# Altium PCB 2 Layers PCB.PcbDoc (part 1 of 2)
Units mm, origin at the board's own origin, x right, y up, seen from the top; angles counter-clockwise.
Board outline 126.36 x 110.87 mm, 2 copper layers (Top Layer, Bottom Layer), stack 1.569 mm thick; 108 components, 114 nets, 540 pads, 148 vias.
Unrouted connection lines stored in the file: 192.
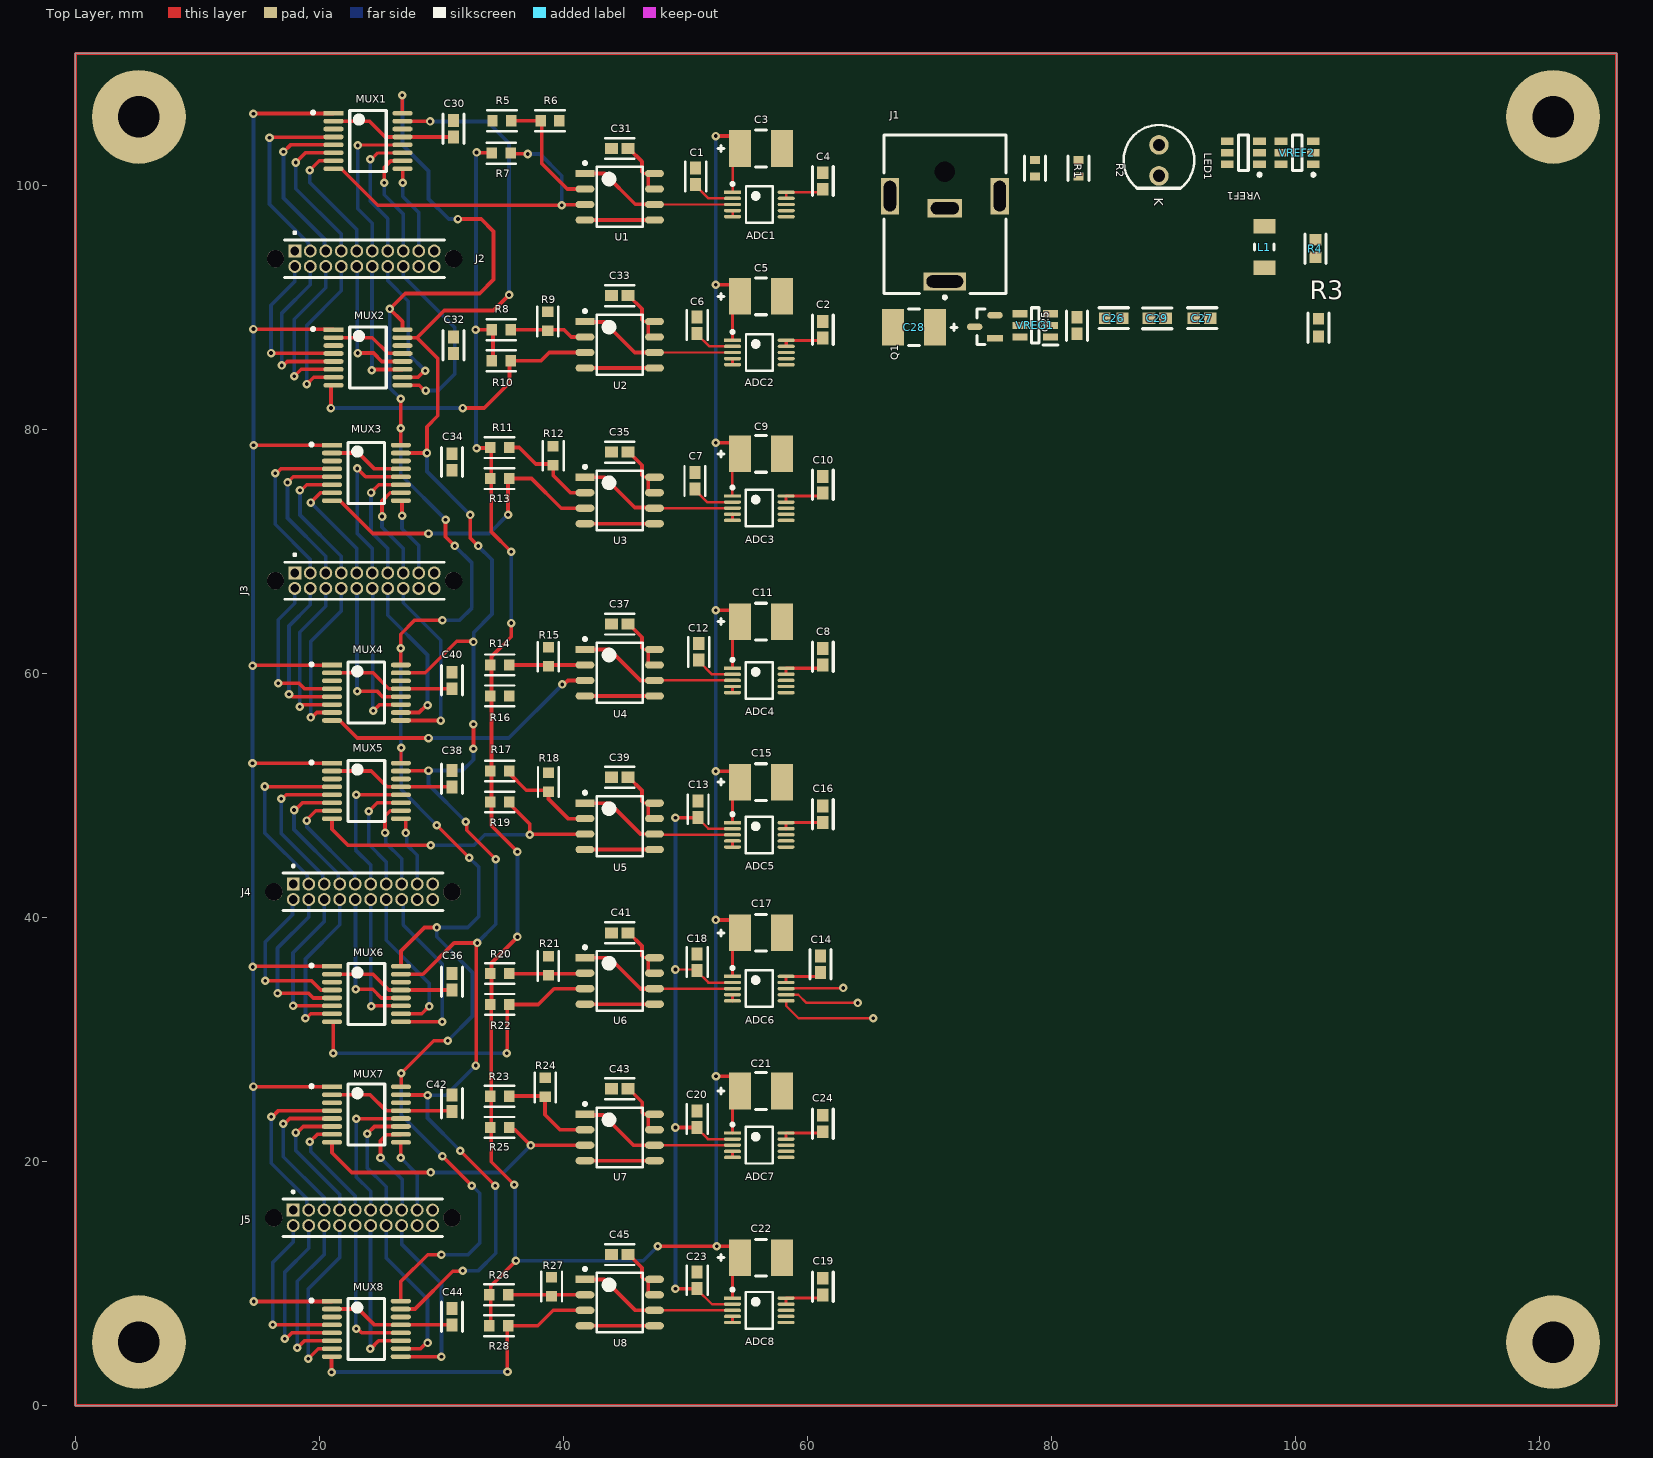
[diagram p0: Top Layer view]
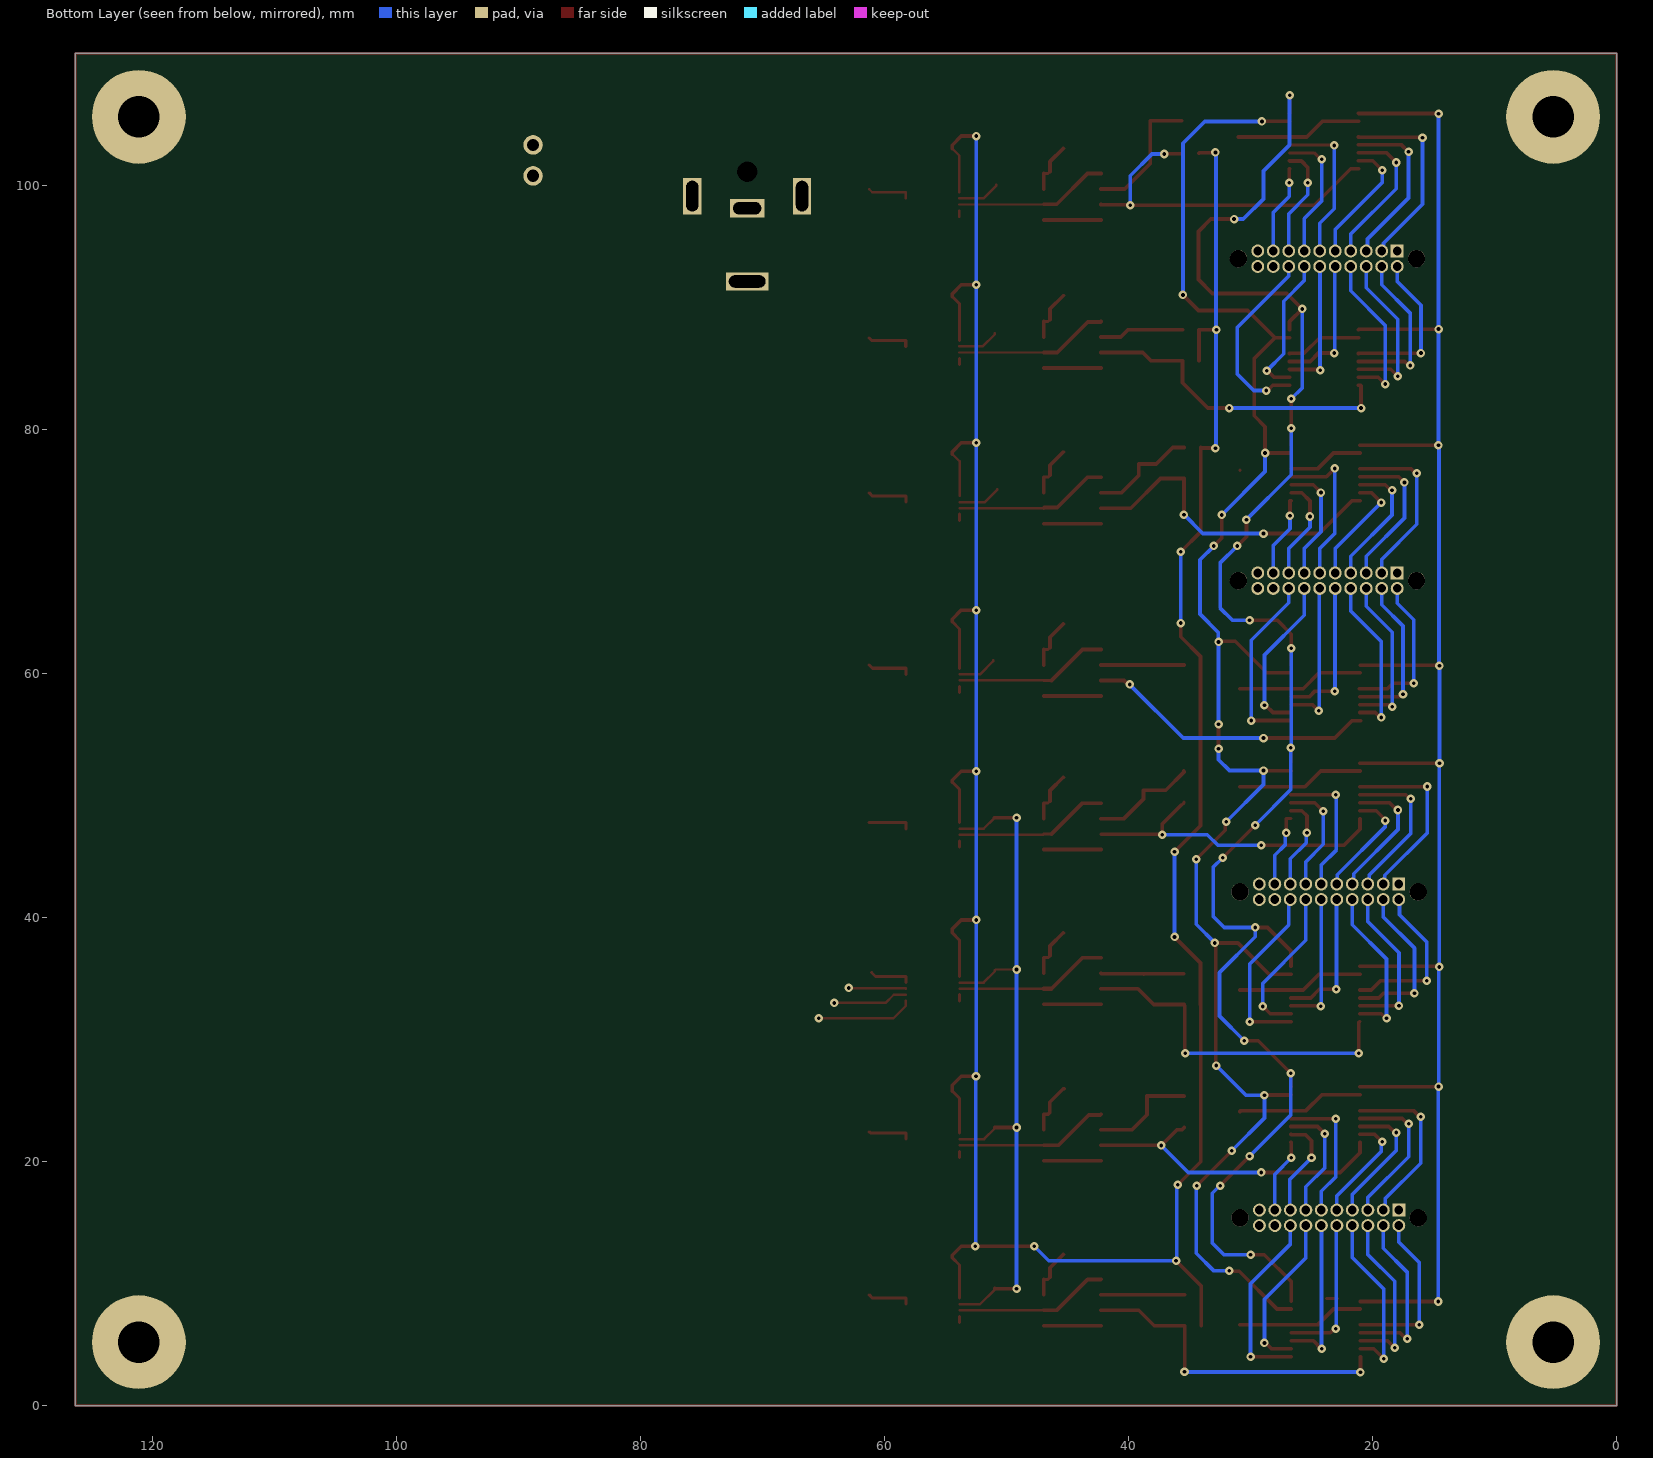
[diagram p1: Bottom Layer view, seen from below]
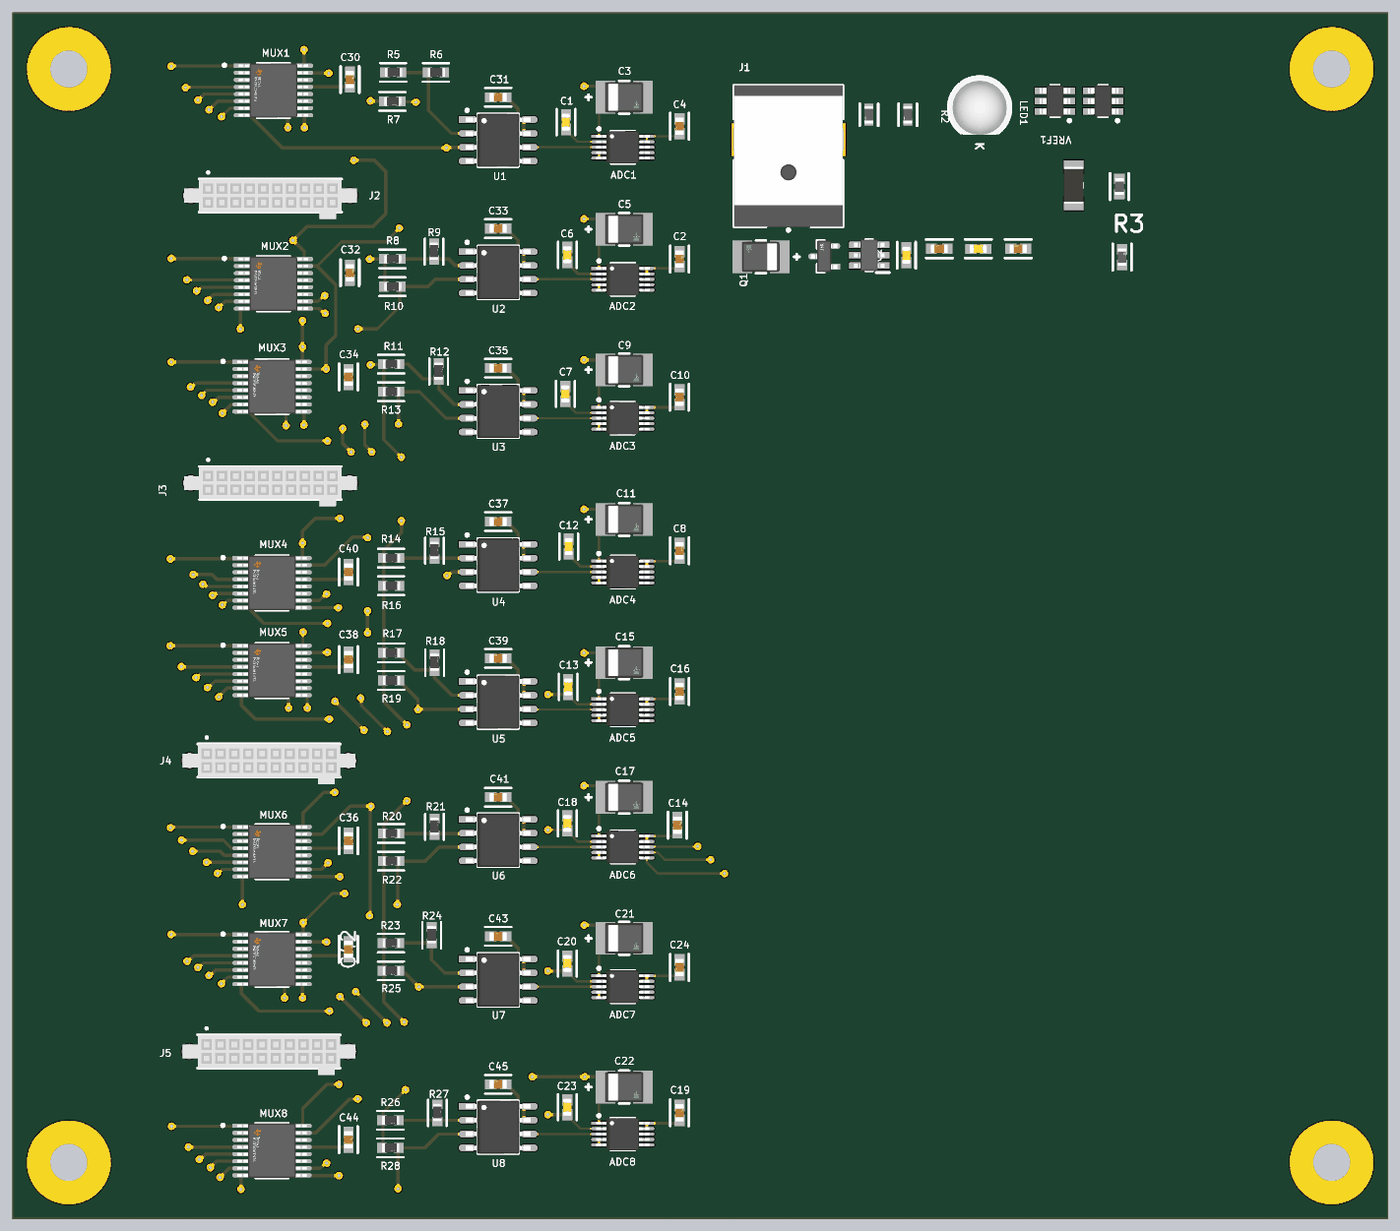
[diagram p3: 3D render of the assembled board from above, using the file's embedded part models]

## Layer stack, top to bottom
Top Solder: solder mask 0.0254, SM-001, Dk 4
Top Layer: signal copper 0.035
Dielectric 1: core 1.4986, Core-043, Dk 4.3
Bottom Layer: signal copper 0.035
Bottom Solder: solder mask 0.0254, SM-001, Dk 4

## Board outline
0,0 0,110.871 126.365,110.871 126.365,0

## Design rules (kind name [scope] priority, off if disabled: settings)
BoardOutlineClearance [All] p1: gap=0.2 ignorepadtopadclearanceinfootprint=FALSE
Clearance [All] p1: gap=0.254 ignorepadtopadclearanceinfootprint=TRUE except(0.127: SMDPad-SMDPad; 0.2: Arc-SMDPad Track-SMDPad; 0.33: Arc-THPad Track-THPad; 0.5: THPad-THPad)
HoleSize [All] p1: absolutevalues=TRUE maxlimit=2.54 minlimit=0.2 maxpercent=80.000 minpercent=20.000
HoleToHoleClearance [All] p1: gap=0.5 allowstackedmicrovias=TRUE
MinimumAnnularRing [All] p1: minimumring=0.2
PolygonConnect [All] p1: connectstyle=Relief reliefconductorwidth=0.254 reliefentries=4 polygonreliefangle="90 Angle" airgapwidth=0.254
RoomDefinition "Power Supply Unit" [InComponentClass('Power Supply Unit')] p1: confinementstyle=ConfineIn formatcopy=TRUE lockcomponents=FALSE outline 64.262,107.315 64.262,58.801 111.633,58.801 111.633,107.315
RoutingVias [All] p1: holewidth=0.3 width=0.7 viastyle="Through Hole" minholewidth=0.2 minwidth=0.5 maxholewidth=0.5 maxwidth=0.9
SolderMaskExpansion [All] p1: expansion=0.102 istentingtop=FALSE
UnRoutedNet [All] p1: checkbadconnections=TRUE
Width [All] p1: maxlimit=0.5 minlimit=0.2 preferedwidth=0.3
27 further rules are at their usual default settings.

## Classes and differential pairs
component class "Weatstone bridge part I": *3 C30 C31 C32 C33 C34 C35 J2 MUX1 MUX2 MUX3 R5 R6 R7 R8 R9 R10 R11 R12 R13 U1 U2 U3
component class "Weatstone bridge part II": *4 C36 C37 C38 C39 C40 C41 J3 J4 MUX4 MUX5 MUX6 R14 R15 R16 R17 R18 R19 R20 R21 R22 U4 U5 U6
component class "Weatstone bridge part III": *5 C42 C43 C44 C45 J5 MUX7 MUX8 R23 R24 R25 R26 R27 R28 U7 U8
component class "Processing interface": *1 ADC1 ADC2 ADC3 ADC4 ADC5 ADC6 ADC7 ADC8 C1 C2 C3 C4 C5 C6 C7 C8 C9 C10 C11 C12 C13 C14 C15 C16 C17 C18 C19 C20 C21 C22 C23 C24
component class "Power Supply Unit": *2 C25 C26 C27 C28 C29 J1 L1 LED1 Q1 R1 R2 R3 R4 VREF1 VREF2 VREG1

## Components (designator, comment, footprint, x,y, rotation, side; value= is the part's Value field where it differs from the comment)
ADC1 "MCP33141-10-E/MS" MCP33141-10-E/MS 56.082,98.478 r0 top
ADC2 "MCP33141-10-E/MS" MCP33141-10-E/MS 56.082,86.343 r0 top
ADC3 "MCP33141-10-E/MS" MCP33141-10-E/MS 56.074,73.582 r0 top
ADC4 "MCP33141-10-E/MS" MCP33141-10-E/MS 56.074,59.459 r0 top
ADC5 "MCP33141-10-E/MS" MCP33141-10-E/MS 56.074,46.799 r0 top
ADC6 "MCP33141-10-E/MS" MCP33141-10-E/MS 56.074,34.191 r0 top
ADC7 "MCP33141-10-E/MS" MCP33141-10-E/MS 56.074,21.355 r0 top
ADC8 "MCP33141-10-E/MS" MCP33141-10-E/MS 56.074,7.82 r0 top
C1 "CC0603KPX7R7BB105" FP-CC0603-DA-IPC_B 50.854,100.784 r270 top value=1uF
C2 "CC0603JRX7R9BB104" FP-CC0603-DA-IPC_B 61.281,88.206 r270 top value=100nF
C3 "293D106X9016B2TE3" FP-293D-B-MFG 56.201,103.069 r180 top value=10uF
C4 "CC0603JRX7R9BB104" FP-CC0603-DA-IPC_B 61.281,100.403 r90 top value=100nF
C5 "293D106X9016B2TE3" FP-293D-B-MFG 56.201,90.94 r180 top value=10uF
C6 "CC0603KPX7R7BB105" FP-CC0603-DA-IPC_B 50.981,88.592 r90 top value=1uF
C7 "CC0603KPX7R7BB105" FP-CC0603-DA-IPC_B 50.8,75.819 r270 top value=1uF
C8 "CC0603JRX7R9BB104" FP-CC0603-DA-IPC_B 61.281,61.406 r270 top value=100nF
C9 "293D106X9016B2TE3" FP-293D-B-MFG 56.201,78.027 r180 top value=10uF
C10 "CC0603JRX7R9BB104" FP-CC0603-DA-IPC_B 61.281,75.511 r90 top value=100nF
C11 "293D106X9016B2TE3" FP-293D-B-MFG 56.201,64.285 r180 top value=10uF
C12 "CC0603KPX7R7BB105" FP-CC0603-DA-IPC_B 51.108,61.795 r90 top value=1uF
C13 "CC0603KPX7R7BB105" FP-CC0603-DA-IPC_B 51.054,48.895 r270 top value=1uF
C14 "CC0603JRX7R9BB104" FP-CC0603-DA-IPC_B 61.087,36.195 r270 top value=100nF
C15 "293D106X9016B2TE3" FP-293D-B-MFG 56.201,51.127 r180 top value=10uF
C16 "CC0603JRX7R9BB104" FP-CC0603-DA-IPC_B 61.281,48.476 r90 top value=100nF
C17 "293D106X9016B2TE3" FP-293D-B-MFG 56.201,38.762 r180 top value=10uF
C18 "CC0603KPX7R7BB105" FP-CC0603-DA-IPC_B 50.981,36.364 r90 top value=1uF
C19 "CC0603JRX7R9BB104" FP-CC0603-DA-IPC_B 61.281,9.767 r270 top value=100nF
C20 "CC0603KPX7R7BB105" FP-CC0603-DA-IPC_B 50.981,23.49 r270 top value=1uF
C21 "293D106X9016B2TE3" FP-293D-B-MFG 56.201,25.8 r180 top value=10uF
C22 "293D106X9016B2TE3" FP-293D-B-MFG 56.201,12.138 r180 top value=10uF
C23 "CC0603KPX7R7BB105" FP-CC0603-DA-IPC_B 50.981,10.287 r90 top value=1uF
C24 "CC0603JRX7R9BB104" FP-CC0603-DA-IPC_B 61.281,23.133 r90 top value=100nF
C25 "CC0603KRX7R5BB225" FP-CC0603-DA-IPC_B 82.111,88.554 r90 top value=2.2uF
C26 "GRM188R71E224KA88D" FP-GRM188-0_1-e0_2_0_5-IPC_B 85.131,89.154 r180 top value=220nF
C27 "CC0603JRX7R9BB104" FP-CC0603-DA-IPC_B 92.371,89.154 r0 top value=100nF
C28 "293D106X9016B2TE3" FP-293D-B-MFG 68.758,88.41 r0 top value=10uF
C29 "CC0603KRX7R5BB225" FP-CC0603-DA-IPC_B 88.715,89.147 r180 top value=2.2uF
C30 "CC0603JRX7R9BB104" FP-CC0603-DA-IPC_B 31.014,104.691 r270 top value=100nF
C31 "CC0603JRX7R9BB104" FP-CC0603-DA-IPC_B 44.631,103.069 r0 top value=100nF
C32 "CC0603JRX7R9BB104" FP-CC0603-DA-IPC_B 31.014,86.938 r270 top value=100nF
C33 "CC0603JRX7R9BB104" FP-CC0603-DA-IPC_B 44.631,91.005 r0 top value=100nF
C34 "CC0603JRX7R9BB104" FP-CC0603-DA-IPC_B 30.887,77.367 r270 top value=100nF
C35 "CC0603JRX7R9BB104" FP-CC0603-DA-IPC_B 44.631,78.178 r0 top value=100nF
C36 "CC0603JRX7R9BB104" FP-CC0603-DA-IPC_B 30.888,34.756 r270 top value=100nF
C37 "CC0603JRX7R9BB104" FP-CC0603-DA-IPC_B 44.631,64.081 r0 top value=100nF
C38 "CC0603JRX7R9BB104" FP-CC0603-DA-IPC_B 30.888,51.409 r270 top value=100nF
C39 "CC0603JRX7R9BB104" FP-CC0603-DA-IPC_B 44.631,51.516 r0 top value=100nF
C40 "CC0603JRX7R9BB104" FP-CC0603-DA-IPC_B 30.887,59.456 r270 top value=100nF
C41 "CC0603JRX7R9BB104" FP-CC0603-DA-IPC_B 44.631,38.762 r0 top value=100nF
C42 "CC0603JRX7R9BB104" FP-CC0603-DA-IPC_B 30.88,24.79 r270 top value=100nF
C43 "CC0603JRX7R9BB104" FP-CC0603-DA-IPC_B 44.631,25.981 r0 top value=100nF
C44 "CC0603JRX7R9BB104" FP-CC0603-DA-IPC_B 30.88,7.301 r270 top value=100nF
C45 "CC0603JRX7R9BB104" FP-CC0603-DA-IPC_B 44.631,12.392 r0 top value=100nF
J1 "PJ-063AH" CUI-PJ-063AH_V 71.284,98.168 r90 top
J2 "SFC-110-T1-F-D-A" SFC-110-T1-F-D-A-Footprint-2 23.709,94.034 r180 top
J3 "SFC-110-T1-F-D-A" SFC-110-T1-F-D-A-Footprint-2 23.709,67.637 r180 top
J4 "SFC-110-T1-F-D-A" SFC-110-T1-F-D-A-Footprint-2 23.583,42.128 r180 top
J5 "SFC-110-T1-F-D-A" SFC-110-T1-F-D-A-Footprint-2 23.575,15.406 r180 top
L1 "ILSB1206ER4R7K" INDC3216X14N 97.478,94.989 r270 top value=4.7uH
LED1 "151053GS03000" "Type 5mm" 88.838,102.096 r270 top
MUX1 "TMUX1208PWR" FP-PW0016A-IPC_B 23.995,103.689 r0 top
MUX2 "TMUX1208PWR" FP-PW0016A-IPC_B 23.995,85.936 r0 top
MUX3 "TMUX1208PWR" FP-PW0016A-IPC_B 23.868,76.477 r0 top
MUX4 "TMUX1208PWR" FP-PW0016A-IPC_B 23.868,58.454 r0 top
MUX5 "TMUX1208PWR" FP-PW0016A-IPC_B 23.869,50.407 r0 top
MUX6 "TMUX1208PWR" FP-PW0016A-IPC_B 23.869,33.754 r0 top
MUX7 "TMUX1208PWR" FP-PW0016A-IPC_B 23.869,23.866 r0 top
MUX8 "TMUX1208PWR" FP-PW0016A-IPC_B 23.861,6.299 r0 top
Q1 "IRLML9303TRPBF" FP-Micro3-IPC_C 74.563,88.45 r180 top
R1 "AC0603FR-072K4L" FP-AC0603-IPC_C 78.673,101.464 r270 top value=2.4kR
R2 "AC0603FR-075K1L" FP-AC0603-IPC_C 82.239,101.464 r270 top value=5.1kR
R3 "CRCW060322K1FKEA" CRCW060322K1FKEA-Footprint-2 101.923,88.385 r270 top value=22K1
R4 "CRCW060388K7FKEB" FP-CRCW0603-e3-IPC_B 101.669,94.862 r90 top value=88K7
R5 "RT0603BRD0710KL" FP-RT0603-IPC_B 34.979,105.348 r0 top value=10K
R6 "RT0603BRD0710KL" FP-RT0603-IPC_B 38.916,105.348 r0 top value=10K
R7 "RT0603BRD0710KL" FP-RT0603-IPC_B 34.917,102.684 r0 top value=10K
R8 "RT0603BRD0710KL" FP-RT0603-IPC_B 34.917,88.211 r0 top value=10K
R9 "RT0603BRD0710KL" FP-RT0603-IPC_B 38.735,88.888 r90 top value=10K
R10 "RT0603BRD0710KL" FP-RT0603-IPC_B 34.917,85.671 r0 top value=10K
R11 "RT0603BRD0710KL" FP-RT0603-IPC_B 34.79,78.55 r0 top value=10K
R12 "RT0603BRD0710KL" FP-RT0603-IPC_B 39.17,77.873 r90 top value=10K
R13 "RT0603BRD0710KL" FP-RT0603-IPC_B 34.79,76.01 r0 top value=10K
R14 "RT0603BRD0710KL" FP-RT0603-IPC_B 34.791,60.729 r0 top value=10K
R15 "RT0603BRD0710KL" FP-RT0603-IPC_B 38.78,61.405 r90 top value=10K
R16 "RT0603BRD0710KL" FP-RT0603-IPC_B 34.791,58.189 r0 top value=10K
R17 "RT0603BRD0710KL" FP-RT0603-IPC_B 34.791,52.032 r0 top value=10K
R18 "RT0603BRD0710KL" FP-RT0603-IPC_B 38.789,51.127 r90 top value=10K
R19 "RT0603BRD0710KL" FP-RT0603-IPC_B 34.791,49.492 r0 top value=10K
R20 "RT0603BRD0710KL" FP-RT0603-IPC_B 34.791,35.433 r0 top value=10K
R21 "RT0603BRD0710KL" FP-RT0603-IPC_B 38.781,36.056 r90 top value=10K
R22 "RT0603BRD0710KL" FP-RT0603-IPC_B 34.791,32.893 r0 top value=10K
R23 "RT0603BRD0710KL" FP-RT0603-IPC_B 34.783,25.369 r0 top value=10K
R24 "RT0603BRD0710KL" FP-RT0603-IPC_B 38.527,26.09 r90 top value=10K
R25 "RT0603BRD0710KL" FP-RT0603-IPC_B 34.783,22.813 r0 top value=10K
R26 "RT0603BRD0710KL" FP-RT0603-IPC_B 34.725,9.09 r0 top value=10K
R27 "RT0603BRD0710KL" FP-RT0603-IPC_B 39.043,9.767 r90 top value=10K
R28 "RT0603BRD0710KL" FP-RT0603-IPC_B 34.725,6.55 r0 top value=10K
U1 "MCP6N11-100E/SN" MCP6N11-100E/SN 44.631,99.113 r0 top
U2 "MCP6N11-100E/SN" MCP6N11-100E/SN 44.631,86.978 r0 top
U3 "MCP6N11-100E/SN" MCP6N11-100E/SN 44.631,74.217 r0 top
U4 "MCP6N11-100E/SN" MCP6N11-100E/SN 44.631,60.094 r0 top
U5 "MCP6N11-100E/SN" MCP6N11-100E/SN 44.631,47.497 r0 top
U6 "MCP6N11-100E/SN" MCP6N11-100E/SN 44.631,34.826 r0 top
U7 "MCP6N11-100E/SN" MCP6N11-100E/SN 44.631,21.99 r0 top
U8 "MCP6N11-100E/SN" MCP6N11-100E/SN 44.631,8.455 r0 top
VREF1 "MCP1501T-33E/CHY" SOT95P280X118-6N 95.758,102.718 r180 top
VREF2 "MCP1501T-18E/CHY" MCP1501T-18E/CHY 100.17,102.718 r180 top
VREG1 "LMR50410YFQDBVRQ1" SOT95P280X145-6N 78.695,88.56 r180 top

## Footprints (in the part's own frame and the unit in brackets; to place one, negate y for a bottom-side part, rotate by r counter-clockwise, add the part's x,y. Pads: shape width x height; smd on the part's side, far side on the other; paste and mask are expansions set on the pad)
CRCW060322K1FKEA-Footprint-2 [mm]
  rect 0.958x0.912 smd paste+0 mask+0: 1(-0.727,0) 2(0.727,0)
  silkscreen extent -1.21,-0.86 1.21,0.86, body extent -1.46,-0.71 1.46,0.71, height 0.25
CUI-PJ-063AH_V [mm] "THD, 2-Leads, Body 13x10mm, Height 9mm"
  rect 1.5x3.5 hole 1 slot 3 at 90 deg: 1(-6,0)
  rect 1.5x2.8 hole 1 slot 2.3 at 90 deg: 2(0,0)
  rect 3x1.5 hole 1 slot 2.5 at 0 deg: 3(1,4.5) 4(1,-4.5)
  round 1.4 hole 1.7 unplated: 5(3,0)
  silkscreen extent -7.42,-5 6,5, body extent -7,-5.15 6,5.15, height 9
FP-293D-B-MFG [mm]
  rect 1.8x3 smd paste+0 mask+0: 1(-1.725,0) 2(1.725,0)
  silkscreen extent -0.45,-1.5 3.52,1.5, body extent -2.73,-1.6 2.73,1.6, height 0.25
FP-AC0603-IPC_C [mm]
  rect 0.659x0.812 smd paste+0 mask+0: 1(-0.677,0) 2(0.677,0)
  silkscreen extent -1.01,-0.85 1.01,0.85, body extent -1.11,-0.55 1.11,0.55, height 0.25
FP-CC0603-DA-IPC_B [mm]
  rect 1.058x0.912 smd paste+0 mask+0: 1(-0.677,0) 2(0.677,0)
  silkscreen extent -1.21,-0.86 1.21,0.86, body extent -1.46,-0.71 1.46,0.71, height 0.25
FP-CRCW0603-e3-IPC_B [mm]
  rect 0.935x0.962 smd paste+0 mask+0: 1(-0.715,0) 2(0.715,0)
  silkscreen extent -1.21,-0.86 1.21,0.86, body extent -1.43,-0.73 1.43,0.73, height 0.25
FP-GRM188-0_1-e0_2_0_5-IPC_B [mm]
  rect 0.959x0.912 smd paste+0 mask+0: 1(-0.727,0) 2(0.727,0)
  silkscreen extent -1.21,-0.86 1.21,0.86, body extent -1.46,-0.71 1.46,0.71, height 0.25
FP-Micro3-IPC_C [mm]
  rect 1.274x0.532 smd paste+0 mask+0: 1(-0.835,0.95)
  rrect100% 1.274x0.532 smd paste+0 mask+0: 2(-0.835,-0.95) 3(0.835,0)
  silkscreen extent 0,-1.46 0.65,1.46, body extent -1.57,-1.56 1.57,1.56, height 0.25
FP-PW0016A-IPC_B [mm]
  rect 1.655x0.381 smd paste+0 mask+0: 1(-2.825,2.275)
  rrect100% 1.655x0.381 smd paste+0 mask+0: 2(-2.825,1.625) 3(-2.825,0.975) 4(-2.825,0.325) 5(-2.825,-0.325) 6(-2.825,-0.975) 7(-2.825,-1.625) 8(-2.825,-2.275) 9(2.825,-2.275) 10(2.825,-1.625) 11(2.825,-0.975) 12(2.825,-0.325) 13(2.825,0.325) 14(2.825,0.975) 15(2.825,1.625) 16(2.825,2.275)
  silkscreen extent -4.63,-2.5 1.5,2.5, body extent -3.9,-2.75 3.9,2.75, height 0.25
FP-RT0603-IPC_B [mm]
  rect 0.859x0.912 smd paste+0 mask+0: 1(-0.777,0) 2(0.777,0)
  silkscreen extent -1.21,-0.86 1.21,0.86, body extent -1.46,-0.71 1.46,0.71, height 0.25
INDC3216X14N [mm] "Chip Inductor, 2-Leads, Body 3,20x1,60mm, IPC Medium Density"
  rect 1.2x1.8 smd: 1(-1.7,0) 2(1.7,0)
  silkscreen extent -0.25,-0.8 0.25,0.8, body extent -1.7,-0.9 1.7,0.9, height 1.4
MCP6N11-100E/SN [mm] "SOIC, 8-Leads, Body 4,90x3,90mm, Pitch 1,27mm, IPC Medium Density"
  rect 1.55x0.6 smd: 1(-2.85,1.905)
  oval 1.55x0.6 smd: 2(-2.85,0.635) 3(-2.85,-0.635) 4(-2.85,-1.905) 5(2.85,-1.905) 6(2.85,-0.635) 7(2.85,0.635) 8(2.85,1.905)
  silkscreen extent -2.97,-2.45 1.88,2.88, body extent -3,-2.45 3,2.45, height 1.75
MCP1501T-18E/CHY [mm] "SOT23, 6-Leads, Body 2,90x2,80mm, Pitch 0,95mm, IPC Medium Density"
  rect 1.05x0.6 smd: 1(-1.325,0.95) 2(-1.325,0) 3(-1.325,-0.95) 4(1.325,-0.95) 5(1.325,0) 6(1.325,0.95)
  silkscreen extent -1.45,-1.45 0.4,1.92, body extent -1.4,-1.45 1.4,1.45, height 1.17
MCP33141-10-E/MS [mm] "TSSOP, 10-Leads, Body 3,00x3,00mm, Pitch 0,50mm, IPC Low Density"
  rect 1.4x0.28 smd: 1(-2.2,1)
  oval 1.4x0.28 smd: 2(-2.2,0.5) 3(-2.2,0) 4(-2.2,-0.5) 5(-2.2,-1) 6(2.2,-1) 7(2.2,-0.5) 8(2.2,0) 9(2.2,0.5) 10(2.2,1)
  silkscreen extent -2.32,-1.5 1.1,1.81, body extent -2.45,-1.5 2.45,1.5, height 1.1
SFC-110-T1-F-D-A-Footprint-2 [mm]
  rect 1.06x1.06 hole 0.71: 1(5.715,-0.635)
  round 1.06 hole 0.71: 2(5.715,0.635) 3(4.445,-0.635) 4(4.445,0.635) 5(3.175,-0.635) 6(3.175,0.635) 7(1.905,-0.635) 8(1.905,0.635) 9(0.635,-0.635) 10(0.635,0.635) 11(-0.635,-0.635) 12(-0.635,0.635) 13(-1.905,-0.635) 14(-1.905,0.635) 15(-3.175,-0.635) 16(-3.175,0.635) 17(-4.445,-0.635) 18(-4.445,0.635) 19(-5.715,-0.635) 20(-5.715,0.635)
  round 1.42 hole 1.42 unplated: ""(-7.305,0) ""(7.305,0)
  silkscreen extent -6.54,-2.22 6.54,1.53, body extent -7.94,-1.52 7.94,2.16, height 4.57
SOT95P280X118-6N [mm] "SOT23, 6-Leads, Body 2,90x2,80mm, Pitch 0,95mm, IPC Medium Density"
  rect 1.05x0.6 smd: 1(-1.325,0.95) 2(-1.325,0) 3(-1.325,-0.95) 4(1.325,-0.95) 5(1.325,0) 6(1.325,0.95)
  silkscreen extent -1.45,-1.45 0.4,1.92, body extent -1.4,-1.45 1.4,1.45, height 1.17
SOT95P280X145-6N [mm]
  rect 1.2x0.6 smd: 1(-1.25,0.95) 2(-1.25,0) 3(-1.25,-0.95) 4(1.25,-0.95) 5(1.25,0) 6(1.25,0.95)
  silkscreen extent -1.85,-1.45 0.3,1.6, body extent -1.4,-1.45 1.4,1.45, height 1.45
"Type 5mm" [mm] "THT, LED-5mm, 2pin- Body 5.8mm"
  round 1.6 hole 1: 1(1.27,0) 2(-1.27,0)
  silkscreen extent -2.9,-2.9 2.29,2.9, body extent -2.9,-2.9 2.5,2.9, height 11.7

## Part data
ADC1 ADC2 ADC3 ADC4 ADC5 ADC6 ADC7 ADC8: library part CMP-020-00028-10, "ADC Single SAR 1Msps 12-bit Serial Microwire/SPI 10-Pin MSOP Tray", Architecture=SAR, Data Interface=SPI, Resolution="12 Bits", Sampling rate=1M
C1 C6 C7 C12 C13 C18 C20 C23: library part CMP-001-00101-1, "0603 1 uF 16 V ±10 % Tolerance X7R SMT Multilayer Ceramic Capacitor", Case Code (Imperial)=0603, Case Code (Metric)=1608, Dielectric=X7R, Max Operating Temperature=125°C, Min Operating Temperature=-55°C, Resistor Type=Ceramic, Tolerance=10%, Voltage Rating (DC)=16V, Case/Package=0603, Construction=Flat, Depth=0.8mm, Halogen Free="Halogen Free", Height=0.8mm, Lead Free="Lead Free", Length=1.6mm, Mounting Technology="Surface Mount", Packaging="Tape and Reel", Radiation Hardening=No, RoHS Compliant=Yes, Termination=SMD/SMT, Weight=7.1E-05oz
C2 C4 C8 C10 C14 C16 C19 C24 C27 C30 C31 C32 C33 C34 C35 C36 C37 C38 C39 C40 C41 C42 C43 C44 C45: library part CMP-001-00097-1, "0603 0.1 uF 50 V ±5 % Tolerance X7R SMT Multilayer Ceramic Capacitor", Case Code (Imperial)=0603, Case Code (Metric)=1608, Dielectric=X7R, Max Operating Temperature=125°C, Min Operating Temperature=-55°C, Resistor Type=Ceramic, Tolerance=5%, Voltage Rating=50V, Case/Package=0603, Construction=Flat, Depth=0.8mm, Halogen Free="Halogen Free", Height=0.8mm, Lead Free="Lead Free", Length=0.063inch, Mounting Technology="Surface Mount", Packaging="Tape and Reel", Pins=2, Radiation Hardening=No, RoHS Compliant=Yes, Series=CC, Termination=SMD/SMT, Thickness=0.035inch, Voltage Rating (DC)=50V, Weight=7.1E-05oz, Width=0.031inch
C3 C5 C9 C11 C15 C17 C21 C22 C28: library part CMP-001-00090-1, "Cap Tant Solid 10uF 16V B CASE 10% (3.5 X 2.8 X 1.9mm) Inward L SMD 3528-21 2 Ohm 125C T/R", Case Code (Imperial)=1411, Case Code (Metric)=3528, Dielectric Material=Tantalum, ESR (Equivalent Series Resistance)=2R, Leakage Current=1.6uA, Max Operating Temperature=125°C, Min Operating Temperature=-55°C, Package Quantity=2000, Ripple Current=160mA, Tolerance=10%, Voltage=16V, Case/Package=1411, Construction=Flat, Depth=2.8mm, Dissipation Factor=6%, Features="General Purpose", Height=1.9mm, Height - Seated (Max)=0.083inch, Lead Free="Lead Free", Length=3.5mm, Mounting Technology="Surface Mount,PCB", Packaging="Tape and Reel", Polarity=Polar, Q Factor=6, Radiation Hardening=No, RoHS Compliant=Yes, Series="TANTAMOUNT®, 293D", Termination=SMD/SMT, Voltage Rating=16V, Voltage Rating (DC)=16V, Width=1.9mm
C25 C29: library part CMP-001-00098-1, "MLCC- CAPACITANCE 225", Case Code (Imperial)=0603, Case Code (Metric)=1608, Dielectric=X7R, Max Operating Temperature=125°C, Min Operating Temperature=-55°C, Resistor Type=Ceramic, Tolerance=10%, Voltage Rating=6.3V, Case/Package=0603, Construction=Flat, Depth=0.8mm, Halogen Free="Halogen Free", Height=0.8mm, Lead Free="Lead Free", Length=0.063inch, Mounting Technology="Surface Mount", Packaging="Tape and Reel", Radiation Hardening=No, RoHS Compliant=Yes, Series=CC, Termination=SMD/SMT, Thickness=0.035inch, Voltage Rating (DC)=6.3V, Weight=7.1E-05oz, Width=0.031inch
C26: library part CMP-001-00102-1, "0603 0.22 uF 25 V ±10% Tolerance X7R SMT Multilayer Ceramic Capacitor", Case Code (Imperial)=0603, Case Code (Metric)=1608, Dielectric=X7R, Max Operating Temperature=125°C, Min Operating Temperature=-55°C, Package Quantity=1, Tolerance=10%, Voltage=25V, Case/Package=0603, Construction=Flat, Depth=0.8mm, Height=0.8mm, Lead Free="Lead Free", Length=1.6mm, Material=Ceramic, Mounting Technology="Surface Mount", Packaging="Tape and Reel", Pins=2, Radiation Hardening=No, Reach SVHC Compliant=Yes, RoHS Compliant=Yes, Series=GRM, Termination=SMD/SMT, Thickness=0.035inch, Voltage Rating=25V, Voltage Rating (DC)=25V, Width=0.031inch
J1: library part CMP-002-00079-1, "2.0 x 6.5 mm, 8.0 A, Horizontal, Through Hole, Shielded, Kinked Pins, Dc Power Jack Connector", Current Rating=8A, Flammability Rating="UL94 V-0", Housing Color=Black, Insulation Resistance=100MR, Max Operating Temperature=85°C, Min Operating Temperature=-25°C, Package Quantity=500, Voltage Rating=24V, Connector Type=Jack, Contact Gender=Male, Contact Material=Copper, Contact Plating=Nickel, Gender=Male, Housing Material=Thermoplastic, Lead Free="Lead Free", Mounting Technology="Through Hole", Number of Conductors=2, Orientation=Horizontal, RoHS Compliant=Yes, Series=-, Shielding=Shielded, Termination="Through Hole"
J2 J3 J4 J5: library part CMP-002-00080-2, "Headers & Wire Housings .050 Tiger Eye Cost-Effective Reliable Socket Strip", Color=Black, Max Operating Temperature=125°C, Min Operating Temperature=-55°C, Voltage Rating (AC)=350V, Connector Type=Receptacle, Contact Finish - Mating=GOLD, Contact Material=Bronze, Contact Plating=Gold, Contact Shape=Square, Contact Type="Female Socket", Fastening Type=Pull, Gender=Female, Insulation Color=Black, Insulation Material=Polymer, Mounting Technology="Through Hole", Number of Contacts=20, Number of Positions=20, Number of Rows=2, Packaging=Rail/Tube, Pitch=0.05inch, RoHS Compliant=Yes, Row Spacing=0.05inch, Series="Tiger Eye™ SFC", Termination=Solder
L1: library part CMP-006-00022-1, "Inductor RF Chip Shielded Multi-Layer 4.7uH 10% 10MHz 45Q-Factor 50mA 900mOhm DCR 1206 T/R", Case Code (Imperial)=1206, Case Code (Metric)=3216, Current Rating=50mA, DC Resistance (DCR)=900mR, Max Operating Temperature=125°C, Min Operating Temperature=-55°C, Package Quantity=3000, Self Resonant Frequency=41MHz, Test Frequency=10MHz, Tolerance=10%, Case/Package=1206, Core Material=Ferrite, Depth=1.8mm, Height=1.1mm, Height - Seated (Max)=0.055inch, Lead Free="Lead Free", Length=0.126inch, Max DC Current=50mA, Mounting Technology="Surface Mount", Packaging="Tape and Reel", Q Factor=45, Radiation Hardening=No, RoHS Compliant=Yes, Series=ILSB-1206, Shielding=Shielded, Termination=SMD/SMT, Weight=0.000353oz, Width=1.6mm
LED1: library part CMP-007-00044-1, "Led, Green, T-1 3/4 (5Mm), 522 Nm, 3.4 V, 30 Ma, 10 Cd Rohs Compliant: Yes", Case/Package=Radial, Color=Green, Forward Current=30mA, Forward Voltage=3.4V, Lens Color=Colorless, Max Operating Temperature=85°C, Min Operating Temperature=-40°C, Package Quantity=1, Test Current=20mA, Dominant Wavelength=522nm, Height=8.85mm, Lens Size=5mm, Lens Style=Round,Domed,Circular, Lens Transparency=Clear, Luminous Intensity=10000mcd, Mounting Technology="Through Hole", Packaging=Bulk, RoHS Compliant=Yes, Series=WL-TMRW, Viewing Angle=30°, Wavelength=522nm
MUX1 MUX2 MUX3 MUX4 MUX5 MUX6 MUX7 MUX8: library part CMP-015-00012-1, "5-V, 8: 1, 1-channel general-purpose analog multiplexer with 1.8-V input logic 16-TSSOP -40 to 125", RoHS Compliant=Yes
Q1: library part CMP-013-00037-1, "-30V Single P-Channel HEXFET Power MOSFET in a Micro3 package, SOT23-3, RoHS", Case/Package=SOT-23, Continuous Drain Current (ID)=2.3A, Drain to Source Resistance=270mR, Drain to Source Voltage (Vdss)=-30V, Gate to Source Voltage (Vgs)=20V, Input Capacitance=160pF, Max Operating Temperature=150°C, Max Power Dissipation=1.25W, Min Operating Temperature=-55°C, Threshold Voltage=-1.3V, Element Configuration=Single, Halogen Free="Halogen Free", Height=0.04inch, Lead Free="Lead Free", Length=0.119inch, Max Dual Supply Voltage=-30V, Mounting Technology="Surface Mount", Packaging="Cut Tape", Pins=3, Power Dissipation=1.25W, Rds On Max=165mR, Reach SVHC Compliant=Yes, Rise Time=14ns, RoHS Compliant=Yes, Series=HEXFET®, Turn-Off Delay Time=9ns, Turn-On Delay Time=7.5ns, Width=0.055inch
R1: library part CMP-009-00195-2, "Res Thick Film 0603 2.4K Ohm 1% 0.1W(1/10W) ±100ppm/C Pad SMD Automotive T/R", Case Code (Imperial)=0603, Case Code (Metric)=1608, Max Operating Temperature=155°C, Max Power Dissipation=100mW, Min Operating Temperature=-55°C, Ratings=AEC-Q200, Resistor Type="Thick Film", Temperature Coefficient=100ppm/°C, Tolerance=1%, Voltage Rating=50V, Case/Package=0603, Features="Moisture Resistant,Automotive AEC-Q200", Height=0.022inch, Length=0.063inch, Number of Terminations=2, Packaging="Tape and Reel", Power Rating=100mW, RoHS Compliant=Yes, Series=AC, Termination=SMD/SMT, Weight=7.1E-05oz, Width=0.8mm
R2: library part CMP-009-00196-1, "Res Thick Film 0603 5.1K Ohm 1% 1/10W ±100ppm/°C Molded SMD Paper T/R", Case Code (Imperial)=0603, Case Code (Metric)=1608, Max Operating Temperature=155°C, Max Power Dissipation=100mW, Min Operating Temperature=-55°C, Ratings=AEC-Q200, Resistor Type="Thick Film", Temperature Coefficient=100ppm/°C, Tolerance=1%, Voltage Rating=50V, Case/Package=0603, Features="Moisture Resistant,Automotive AEC-Q200", Height=0.45mm, Length=1.6mm, Number of Terminations=2, Packaging="Tape and Reel", Power Rating=100mW, RoHS Compliant=Yes, Series=AC, Termination=SMD/SMT, Weight=7.1E-05oz, Width=0.8mm
R3: library part CMP-009-00200-2, "Res Thick Film 0603 22.1K Ohm 1% 1/10W ±100ppm/°C Molded SMD SMD Paper T/R", Case Code (Imperial)=0603, Case Code (Metric)=1608, Max Operating Temperature=155°C, Max Power Dissipation=100mW, Min Operating Temperature=-55°C, Package Quantity=10, Ratings=AEC-Q200, Resistance Tolerance=1%, Resistor Type="Thick Film", Temperature Coefficient=100ppm/°C, Voltage Rating=75V, Case/Package=0603, Construction=Rectangular, Contact Plating=Tin, Depth=0.85mm, Features="Automotive AEC-Q200", Height=0.45mm, Lead Free="Lead Free", Length=1.55mm, Military Standard=Not, Mounting Technology="Surface Mount", Number of Terminations=2, Packaging="Tape and Reel", Power Rating=100mW, Radiation Hardening=No, RoHS Compliant=Yes, Series=CRCW, Technology="THICK FILM", Termination=SMD/SMT, Tolerance=1%, Voltage Rating (DC)=75V, Weight=7.1E-05oz, Width=0.033inch
R4: library part CMP-009-00199-2, "D11/CRCW0603 100 88K7 1% ET5 e3", Case Code (Imperial)=0603, Case Code (Metric)=1608, Max Operating Temperature=155°C, Max Power Dissipation=100mW, Min Operating Temperature=-55°C, Package Quantity=10000, Resistor Type="Thick Film", Temperature Coefficient=100ppm/°C, Tolerance=1%, Voltage Rating=75V, Case/Package=0603, Construction=Rectangular, Depth=0.85mm, Features="Automotive AEC-Q200", Height=0.02inch, Lead Free="Lead Free", Length=0.061inch, Military Standard=Not, Number of Terminations=2, Packaging="Tape and Reel", Power Rating=100mW, RoHS Compliant=Yes, Series=CRCW, Termination=SMD/SMT, Weight=7.1E-05oz, Width=0.85mm
R5 R6 R7 R8 R9 R10 R11 R12 R13 R14 R15 R16 R17 R18 R19 R20 R21 R22 R23 R24 R25 R26 R27 R28: library part CMP-009-00178-1, "Res High precision Thin Film 0603 10K Ohm 0.1% 1/10W ±25ppm/°C Molded SMD Paper T/R", Case Code (Imperial)=0603, Case Code (Metric)=1608, Max Operating Temperature=155°C, Max Power Dissipation=100mW, Min Operating Temperature=-55°C, Package Quantity=5000, Resistor Type="Thin Film", Temperature Coefficient=25ppm/°C, Voltage Rating=75V, Case/Package=0603, Construction=Rectangular, Depth=0.8mm, Features="Moisture Resistant", Height=0.022inch, Lead Free="Lead Free", Length=0.063inch, Military Standard=Not, Number of Terminations=2, Packaging="Tape and Reel", Power Rating=100mW, RoHS Compliant=Yes, Series=RT, Technology="THIN FILM", Termination=SMD/SMT, Voltage Rating (DC)=75V, Weight=7.1E-05oz, Width=0.8mm, Working Voltage=75V
U1 U2 U3 U4 U5 U6 U7 U8: library part CMP-014-00010-7, "MCP6N11 Series Single Channel 500 KHz 5.5 V Instrumentation Amplifier - SOIC-8", Case/Package=SOIC, Input Bias Current=10pA, Input Offset Voltage (Vos)=350uV, Max Operating Temperature=125°C, Max Supply Current=800uA, Max Supply Voltage=5.5V, Min Operating Temperature=-40°C, Min Supply Voltage=1.8V, Package Quantity=100, Power Supply Rejection Ratio (PSRR)=86dB, Bandwidth=500kHz, Common Mode Rejection Ratio=86dB, Gain Bandwidth Product=35MHz, Height=1.25mm, Input Offset Voltage-Max=350uV, Lead Free="Lead Free", Length=4.9mm, Mounting Technology="Surface Mount", Nominal Supply Current=800uA, Number of Amplifiers=1, Number of Channels=1, Number of Circuits=1, Number of Elements=2, Packaging=Rail/Tube, Pins=8, Radiation Hardening=No, Reach SVHC Compliant=Yes, RoHS Compliant=Yes, Slew Rate=6V/µs, Slew Rate-Nom=9V/µs, Supply Current=800uA, Unity Gain Bandwidth Product=35MHz, Width=3.9mm
VREF1: library part CMP-019-00066-2, "V-Ref Precision 3.3V 20mA 6-Pin SOT-23 T/R", Case/Package=SOT-23-6, Max Operating Temperature=125°C, Min Operating Temperature=-40°C, Min Output Voltage=3.3V, Operating Supply Current=550uA, Output Current=20mA, Temperature Coefficient=50ppm/°C, Tolerance=0.08%, Mounting Technology="Surface Mount", Output Type=Fixed, Packaging="Cut Tape", Reference Type=Series, RoHS Compliant=Yes, Series=-
VREF2: library part CMP-019-00064-2, "MCP1501 Series 1.8 V 20 mA High Precision Buffered Voltage Reference SOT-23-6", Case/Package=SOT-23-6, Max Operating Temperature=125°C, Min Operating Temperature=-40°C, Min Output Voltage=1.8V, Operating Supply Current=550uA, Output Current=20mA, Temperature Coefficient=50ppm/°C, Tolerance=0.08%, Mounting Technology="Surface Mount", Output Type=Fixed, Packaging="Cut Tape", Reference Type=Series, RoHS Compliant=Yes, Series=-
VREG1: "Power Supply", Manufacturer_Name="Texas Instruments", Mouser Part Number=595-MR50410YFQDBVRQ1, Supplier Part Number 1=296-LMR50410YFQDBVRQ1CT-ND, Arrow Part Number=LMR50410YFQDBVRQ1, Arrow Price/Stock=https://www.arrow.com/en/products/lmr50410yfqdbvrq1/texas-instruments?region=nac, Datasheet Link=https://www.ti.com/product/LMR50410-Q1, Height=1.45mm, Manufacturer_Part_Number=LMR50410YFQDBVRQ1, Mouser Price/Stock=https://www.mouser.co.uk/ProductDetail/Texas-Instruments/LMR50410YFQDBVRQ1?qs=81r%252BiQLm7BRUAgUFqYZycA%3D%3D, Supplier 1=Digi-Key

## Free pads (board coordinates)
  round 7.7 hole 3.4: 3(5.207,5.207) 3(5.207,105.664) 3(121.158,105.664) 3(121.158,5.207)

## Via types
v1: diameter 0.7, hole 0.3, Top Layer to Bottom Layer, 148 vias

## Nets (pads, with @x,y where several pads share a name; then routed paths per layer and width w, separated by ;. In a path a pad name is that pad's centre, name@x,y a point inside that pad or via, vN(x,y) a via of type N, cw(c..) or ccw(c..) an arc to the next point about the centre after c; other vN are vias at no path point)
A1: J2.3 MUX1.4 | length 15.9
  Top Layer w0.3: v1(15.92,103.951) 15.968,103.998 21.154,103.998 MUX1.4@21.169,104.014
  Bottom Layer w0.3: v1(15.92,103.951) 15.92,98.507 19.119,95.308 19.119,94.815 J2.3@19.264,94.669
A2: J2.5 MUX1.5 | length 13.9
  Top Layer w0.3: v1(17.063,102.808) 17.083,102.808 17.639,103.364 MUX1.5@21.169,103.364
  Bottom Layer w0.3: v1(17.063,102.808) 17.063,99.015 20.429,95.649 20.429,94.775 J2.5@20.534,94.669
A3: J2.7 MUX1.6 | length 12.2
  Top Layer w0.3: v1(18.079,101.919) 18.874,102.714 MUX1.6@21.169,102.714
  Bottom Layer w0.3: v1(18.079,101.919) 18.079,99.777 21.804,96.052 J2.7@21.804,94.669
A4: J2.9 MUX1.7 | length 10.5
  Top Layer w0.3: v1(19.222,101.284) 20.002,102.064 MUX1.7@21.169,102.064
  Bottom Layer w0.3: v1(19.222,101.284) 19.222,100.285 23.074,96.433 J2.9@23.074,94.669
A5: J2.11 MUX1.12 | length 12.8
  Top Layer w0.25: v1(23.159,103.316) 23.207,103.363 MUX1.12@26.82,103.364
  Bottom Layer w0.3: v1(23.159,103.316) 23.159,98.126 24.344,96.941 J2.11@24.344,94.669
A6: J2.13 MUX1.11 | length 11
  Top Layer w0.25: v1(24.175,102.173) 24.262,102.173 24.803,102.714 MUX1.11@26.82,102.714
  Bottom Layer w0.3: v1(24.175,102.173) 24.175,98.761 25.614,97.322 J2.13@25.614,94.669
A7: J2.15 MUX1.10 | length 9.2
  Top Layer w0.3: v1(25.318,100.268) 25.318,101.518 25.848,102.048 26.805,102.048 MUX1.10@26.82,102.064
  Bottom Layer w0.3: v1(25.318,100.268) 25.318,99.269 26.884,97.703 J2.15@26.884,94.669
A8: J2.17 MUX1.9 | length 7.3
  Top Layer w0.3: MUX1.9@26.82,101.414 26.842,101.391 v1(26.842,100.268)
  Bottom Layer w0.3: v1(26.842,100.268) 26.842,99.142 28.154,97.83 J2.17@28.154,94.669
B1: J2.2 MUX2.4 | length 13
  Top Layer w0.3: v1@16.068,86.277 21.154,86.277 MUX2.4@21.169,86.261
  Bottom Layer w0.3: v1(16.047,86.298) 16.047,90.215 17.994,92.162 J2.2@17.994,93.399
B2: J2.4 MUX2.5 | length 13.5
  Top Layer w0.3: v1(16.936,85.282) 17.045,85.282 17.374,85.611 MUX2.5@21.169,85.611
  Bottom Layer w0.3: v1(16.936,85.282) 16.936,89.58 19.264,91.908 J2.4@19.264,93.399
B3: J2.6 MUX2.6 | length 13.5
  Top Layer w0.3: v1(17.952,84.393) 18.521,84.961 MUX2.6@21.169,84.961
  Bottom Layer w0.3: v1(17.952,84.393) 17.952,89.072 20.534,91.654 J2.6@20.534,93.399
B4: J2.8 MUX2.7 | length 13.2
  Top Layer w0.3: v1(18.968,83.758) 18.993,83.758 19.546,84.311 MUX2.7@21.169,84.311
  Bottom Layer w0.3: v1(18.968,83.758) 18.968,88.564 21.804,91.4 J2.8@21.804,93.399
B5: J2.10 MUX2.12 | length 11.1
  Top Layer w0.3: v1(23.159,86.298) 24.446,86.298 25.133,85.611 MUX2.12@26.82,85.611
  Bottom Layer w0.3: J2.10@23.074,93.399 23.117,93.357 23.117,86.34 v1(23.159,86.298)
B6: J2.12 MUX2.11 | length 11.1
  Top Layer w0.3: v1(24.302,84.901) 24.348,84.946 26.805,84.946 MUX2.11@26.82,84.961
  Bottom Layer w0.3: v1(24.302,84.901) 24.323,84.921 24.323,93.378 J2.12@24.344,93.399
B7: J2.14 MUX2.10 | length 11.9
  Top Layer w0.3: MUX2.10@26.82,84.311 28.098,84.311 28.623,84.836 v1(28.702,84.836)
  Bottom Layer w0.3: J2.14@25.614,93.399 25.614,92.242 27.305,90.551 27.305,86.233 v1(28.702,84.836)
B8: J2.16 MUX2.9 | length 15.6
  Top Layer w0.3: MUX2.9@26.82,83.661 28.194,83.661 28.632,83.223 v1(28.74,83.223)
  Bottom Layer w0.3: J2.16@26.884,93.399 26.889,93.394 26.889,92.618 31.115,88.392 31.115,84.582 29.756,83.223 v1(28.74,83.223)
C1: J3.3 MUX3.4 | length 14.4
  Top Layer w0.25: MUX3.4@21.025,76.784 MUX3.4@21.042,76.802
  Top Layer w0.3: v1(16.383,76.454) 16.491,76.454 16.839,76.802 MUX3.4@21.042,76.802
  Bottom Layer w0.25: J3.3@19.109,68.427 J3.3@19.264,68.272
  Bottom Layer w0.3: v1(16.383,76.454) 16.383,72.263 19.264,69.382 J3.3@19.264,68.272
C2: J3.5 MUX3.5 | length 12.6
  Top Layer w0.3: v1(17.399,75.692) 17.859,76.152 MUX3.5@21.042,76.152
  Bottom Layer w0.3: v1(17.399,75.692) 17.399,72.771 20.534,69.636 J3.5@20.534,68.272
C3: J3.7 MUX3.6 | length 11.2
  Top Layer w0.25: MUX3.6@21.04,75.499 MUX3.6@21.042,75.502
  Top Layer w0.3: v1(18.415,75.057) 18.523,75.057 18.968,75.502 MUX3.6@21.042,75.502
  Bottom Layer w0.25: J3.7@21.677,68.399 J3.7@21.804,68.272
  Bottom Layer w0.3: v1(18.415,75.057) 18.415,73.025 21.804,69.636 J3.7@21.804,68.272
C4: J3.9 MUX3.7 | length 9.4
  Top Layer w0.3: v1(19.304,74.041) 20.099,74.836 21.027,74.836 MUX3.7@21.042,74.852
  Bottom Layer w0.3: v1(19.304,74.041) 23.074,70.271 J3.9@23.074,68.272
C5: J3.11 MUX3.12 | length 13
  Top Layer w0.25: MUX3.12@26.668,76.177 MUX3.12@26.693,76.152
  Top Layer w0.3: v1(23.114,76.835) 23.797,76.152 26.643,76.152 MUX3.12@26.668,76.177
  Bottom Layer w0.3: v1(23.114,76.835) 23.114,71.501 24.344,70.271 J3.11@24.344,68.272
C6: J3.13 MUX3.11 | length 9.9
  Top Layer w0.3: v1(24.247,74.861) 24.887,75.502 MUX3.11@26.693,75.502
  Bottom Layer w0.3: v1(24.247,74.861) 24.247,71.638 25.614,70.271 J3.13@25.614,68.272
C7: J3.15 MUX3.10 | length 8.4
  Top Layer w0.3: v1(25.146,72.898) 25.146,74.168 25.814,74.836 26.678,74.836 MUX3.10@26.693,74.852
  Bottom Layer w0.3: v1(25.146,72.898) 25.146,72.009 26.884,70.271 J3.15@26.884,68.272
C8: J3.17 MUX3.9 | length 6.6
  Top Layer w0.3: MUX3.9@26.693,74.202 26.749,74.202 26.787,74.164 v1(26.787,72.956)
  Bottom Layer w0.3: v1(26.787,72.956) 26.787,71.892 28.154,70.525 J3.17@28.154,68.272
D0: MUX1.1 MUX2.1 MUX3.1 MUX4.1 MUX5.1 MUX6.1 MUX7.1 MUX8.1 | length 149.3
  Top Layer w0.25: v1(14.524,52.669) v1@14.537,52.682 ; v1(14.547,35.968) v1@14.608,36.029 ; MUX4.1@21.004,60.69 MUX4.1@21.042,60.729
  Top Layer w0.3: v1@14.537,52.682 MUX5.1@21.043,52.682 ; v1@14.57,60.69 MUX4.1@21.004,60.69 ; v1(14.605,88.265) 14.632,88.238 21.142,88.238 MUX2.1@21.169,88.211 ; v1(14.605,105.918) 14.628,105.941 21.147,105.941 MUX1.1@21.169,105.964 ; v1@14.608,36.029 MUX6.1@21.043,36.029 ; v1(14.611,78.746) 21.036,78.746 MUX3.1@21.042,78.752 ; v1@14.615,26.152 21.033,26.152 MUX7.1@21.043,26.141 ; v1(14.638,8.542) 21.003,8.542 MUX8.1@21.035,8.574
  Bottom Layer w0.25: v1(14.524,52.669) v1@14.547,52.647 ; v1(14.532,60.652) v1@14.568,60.689
  Bottom Layer w0.3: v1(14.524,52.669) 14.528,52.673 14.528,60.649 v1(14.532,60.652) ; v1@14.547,52.647 v1(14.547,35.968) 14.576,35.939 14.576,26.191 v1(14.605,26.162) ; v1@14.568,60.689 v1@14.568,78.703 ; v1(14.605,105.918) v1(14.605,88.265) 14.608,88.262 14.608,78.749 v1(14.611,78.746) ; v1@14.621,8.558 v1@14.621,26.146